# Altium PCB LPCB234R0.PcbDoc (part 2 of 2)
Units mm, origin at the board's own origin, x right, y up, seen from the top; angles counter-clockwise.
Board outline 194 x 165.7 mm, 2 copper layers (Top Layer, Bottom Layer); 143 components, 115 nets, 627 pads, 212 vias.
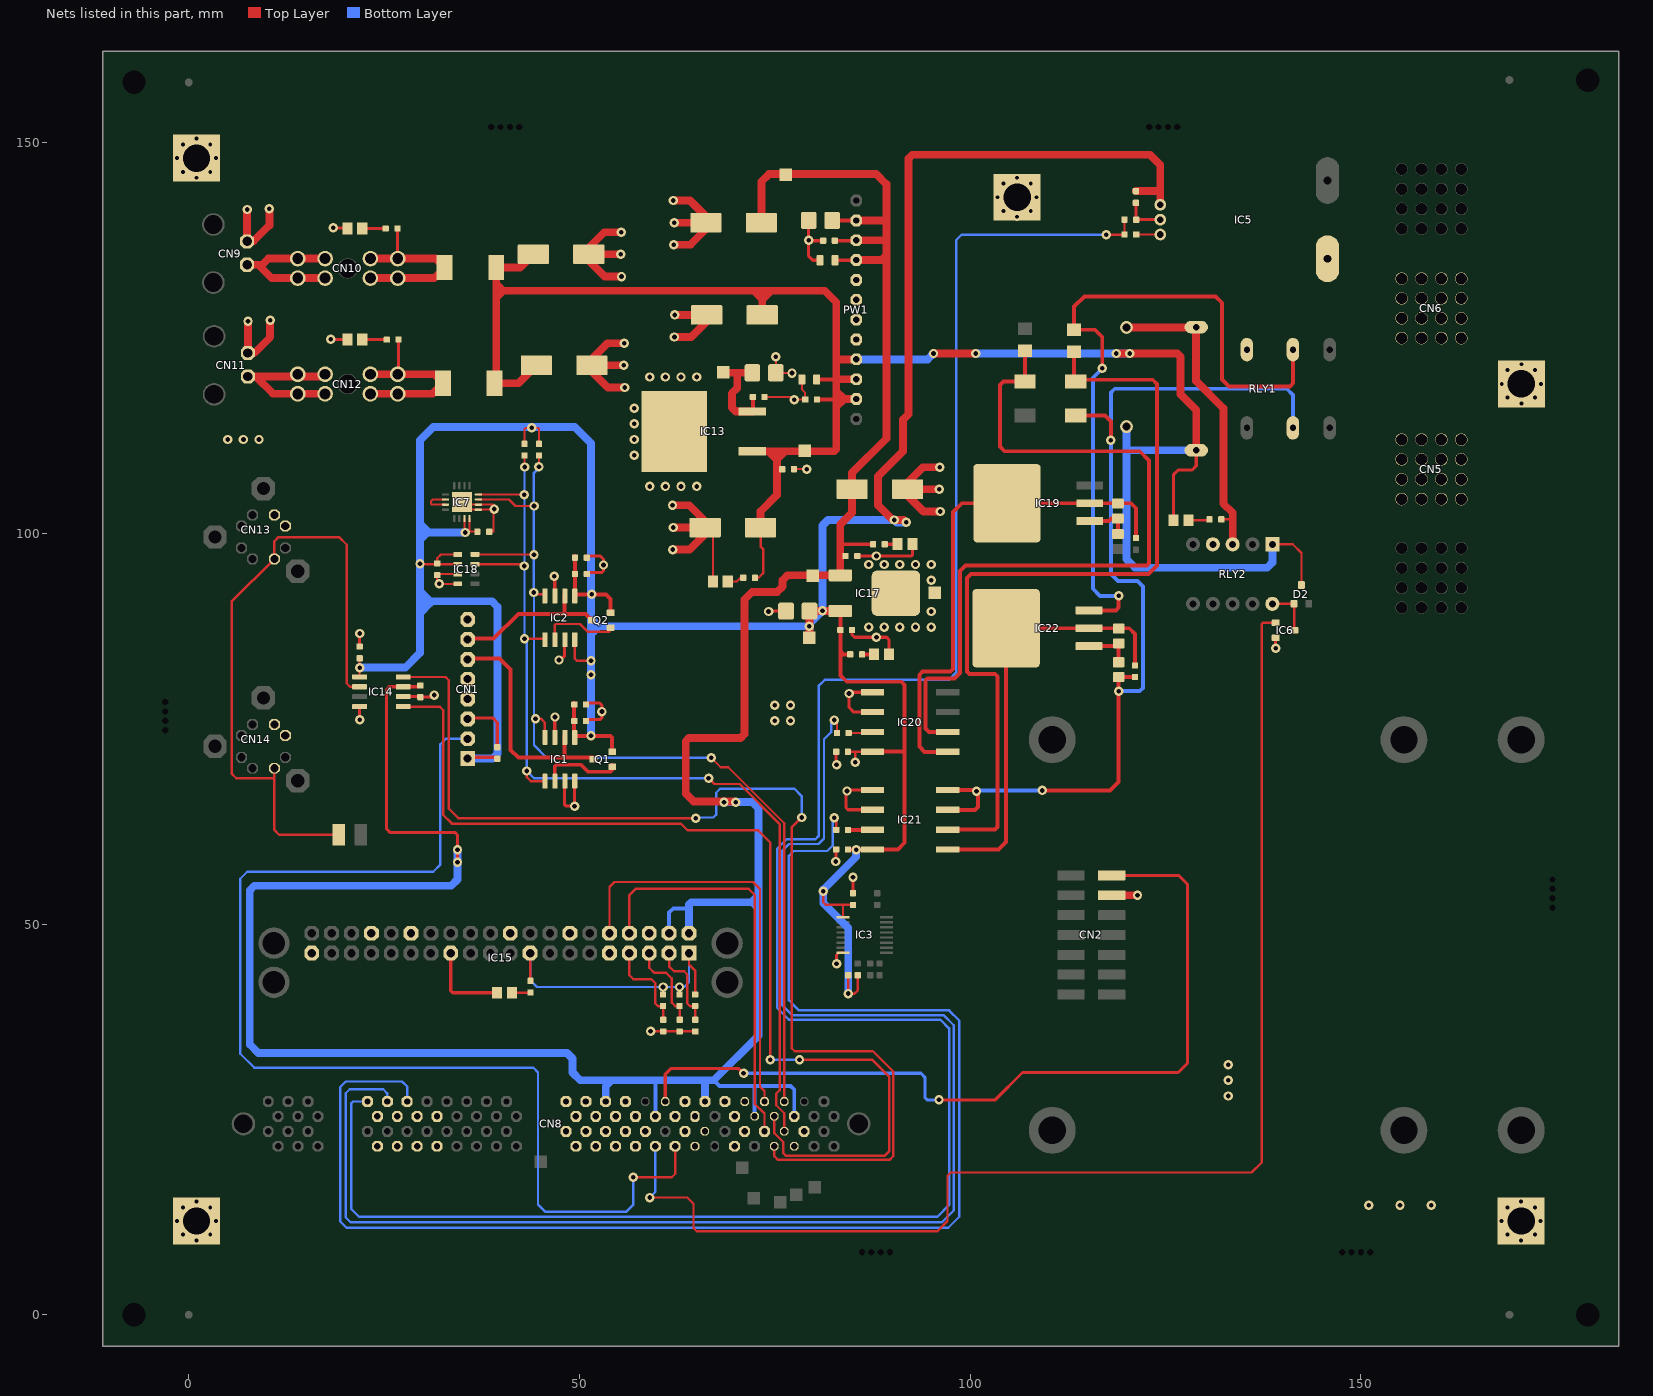
[diagram p2: the nets of this part, all layers, seen from the top]

## Via types
v1: diameter 1.2, hole 0.6, Top Layer to Bottom Layer, 168 vias
v2: diameter 1.016, hole 0.5, Top Layer to Bottom Layer, tented both sides, 40 vias
v3: diameter 0.5, hole 0.2, Top Layer to Bottom Layer, 4 vias

## Nets (pads, with @x,y where several pads share a name; then routed paths per layer and width w, separated by ;. In a path a pad name is that pad's centre, name@x,y a point inside that pad or via, vN(x,y) a via of type N, cw(c..) or ccw(c..) an arc to the next point about the centre after c; other vN are vias at no path point) (continued)
CAN_L: CN13.2 CN14.2 IC14.6 R13.2 | length 83.5
  Top Layer w0.3: CN14.2@10.96,69.933 10.96,68.66 ; R13.2@19.2,61.42 11.57,61.42 10.96,62.03 10.96,68.66 ; IC14.6@21.86,80.363 20.647,80.363 20.21,80.8 20.21,98.54 19.24,99.51 11.49,99.51 10.96,98.98 CN13.2@10.96,96.728 5.49,91.258 5.49,69.25 6.08,68.66 10.96,68.66
CHARGE_N_HOT: C25.2 CN5.1 IC21.3 IC21.4 R32.1 R33.1 RLY1.3 | length 123.6
  Top Layer w0.5: IC21.3@97.1,64.618 100.618,64.618 101,65 101,66.9 100.742,67.158 IC21.4@97.1,67.158 ; v1(109.2,67.1) 117.9,67.1 119,68.2 R32.1@119,81.598 C25.2@121.1,81.598 ; R33.1@113.5,115.048 117.252,115.048 118,114.3 v1(118,111.9)
  Bottom Layer w0.5: v1(100.8,67) 100.9,67.1 v1(109.2,67.1) ; v1(119,79.8) 121.7,79.8 122.1,80.2 122.1,93.2 121.4,93.9 118.9,93.9 118,94.8 v1(118,111.9) 118,118 118.5,118.5 140.5,118.5 141.295,117.705 RLY1.3@141.295,113.493
CHARGE_P_HOT: CN6.1 IC22.3 R29.2 RLY1.4 | length 92.3
  Top Layer w0.5: IC22.3@115.2,90.133 118.633,90.133 119,90.5 v1(119,92) ; v1(116.9,121.1) 116.9,125.1 115.952,126.048 R29.2@113.3,126.048 113.3,129 114.6,130.3 131.4,130.3 132.2,129.5 132.2,119.7 133.1,118.8 140.9,118.8 141.295,119.195 RLY1.4@141.295,123.503
  Bottom Layer w0.5: v1(116.9,121.1) 115.7,119.9 115.7,92.9 116.6,92 v1(119,92)
CHG_BUS_TIE: CN8.32 IC6.1 | length 169.7
  Top Layer w0.3: v1(59,15) 63.8,15 64.6,14.2 64.6,11.1 65,10.7 ; 68.2,10.7 65,10.7 ; IC6.1@139.085,88.535 137.435,88.535 137.3,88.4 137.3,19.5 136,18.2 97.5,18.2 97.1,17.8 97.1,12 95.8,10.7 65,10.7
  Bottom Layer w0.3: v1(59,15) 59.705,15.705 CN8.32@59.705,21.568
CHG_CURRENT: C8.1 CN8.57 R6.1 | length 281.8
  Top Layer w0.3: v1(117.4,138.2) 119.715,138.2 R6.1@119.747,138.233 C8.1@119.747,140.133
  Bottom Layer w0.3: CN8.57@22.875,27.288 21.04,27.288 20.8,27.048 20.8,13.548 21.8,12.548 95.8,12.548 97.3,14.048 97.3,36.648 96.2,37.748 76.8,37.748 75.3,39.248 75.3,59.648 76.5,60.848 80.2,60.848 80.6,61.248 80.6,80.448 81.4,81.248 97.248,81.248 98.2,82.2 98.2,137.5 98.9,138.2 v1(117.4,138.2)
D3V3A: C1.1 C2.1 C3.1 C4.1 C5.1 C6.1 C9.1 C11.1 C18.1 C20.1 C21.1 C22.1 C24.1 CN1.1 CT1.1 IC1.1 IC2.1 IC2.8 IC3.1 IC5.1 IC7.15 IC7.16 IC14.5 IC17.3 IC18.1 IC18.2 IC20.8 IC21.8 Q1.2 Q2.2 R1.2 R2.2 R18.2 R19.2 R22.2 TP8.1 | length 439.2
  Top Layer w0.254: IC7.15@35.285,101.898 35.285,100.215 v1(35.4,100.1) ; IC7.16@35.935,101.898 35.935,100.235 v1@35.9,100.2 ; C9.1@36.95,100.2 v1@35.9,100.2 ; R18.2@42.96,111.448 42.96,113.36 43.1,113.5 v1(43.9,113.5) 44.7,113.5 44.82,113.38 R19.2@44.82,111.448 ; v1(35.4,100.1) 35.5,100.2 v1@35.9,100.2 ; v1(35.4,100.1) 35.8,100.1 v1@35.9,100.2
  Top Layer w0.3: IC14.5@21.86,81.633 21.86,84 C18.1@21.87,84.01 ; v1(29.6,96.1) 29.657,96.043 IC18.2@34.43,96.043 ; C21.1@31.8,96.15 31.8,96.8 32.293,97.293 IC18.1@34.43,97.293 ; IC2.8@49.378,86.586 49.378,83.981 49.673,83.686 v1(51.473,83.686) ; v1(81.2,54.2) 81.2,52.8 81.55,52.45 83.7,52.45 ; IC3.1@83.725,50.875 83.725,52.425 83.7,52.45 ; C22.1@84.35,72.048 85.3,72.048 ; R2.2@84.4,43.45 v1(84.4,41.1) 85.2,41.1 85.6,41.5 R1.2@85.6,43.45 ; C6.1@85,52.45 83.7,52.45 ; v1(85.3,70.7) 85.3,72.048 ; IC20.8@87.5,72.038 87.49,72.048 85.3,72.048
  Top Layer w0.4: CN1.1@35.213,71.336 C5.1@39.473,71.336
  Top Layer w0.5: C3.1@49.323,78.286 49.323,74.141 49.378,74.086 53.973,74.086 54.173,73.886 Q1.2@54.173,72.236 ; C4.1@49.423,97.086 49.423,92.231 49.378,92.186 53.373,92.186 53.973,91.586 Q2.2@53.973,90.036 ; IC17.3@83.371,90.052 83.38,90.043 C11.1@83.38,87.638 83.38,84.92 ; C24.1@84.35,59.548 87.49,59.548 IC21.8@87.5,59.538 90.738,59.538 91.6,60.4 91.6,72.1 ; R22.2@84.64,84.51 83.79,84.51 83.38,84.92 ; IC20.8@87.49,72.048 87.542,72.1 91.6,72.1 ; 83.38,84.92 83.38,81.82 84.2,81 91.2,81 91.6,80.6 91.6,72.1
  Top Layer w1: TP8.1@79.43,86.638 CT1.1@79.43,90.038 79.444,90.052 IC17.3@83.371,90.052 ; v1(91.8,101.4) 91.5,101.7 v1(90.3,101.7) 90.1,101.7 88.2,103.6 88.2,107.3 91.4,110.5 91.4,114.548 92.1,115.248 92.1,147.948 92.6,148.448 123,148.448 124.32,147.128 124.32,143.8 ; C20.1@121.197,143.783 124.303,143.783 124.32,143.8 ; IC5.1@124.32,142.048 124.32,143.8
  Bottom Layer w1: v1(21.9,82.81) 27.71,82.81 29.6,84.7 29.6,89.8 ; 29.6,92.7 29.6,92.6 ; v1(35.4,100.1) 30.5,100.1 ; CN1.1@35.7,71.168 38.868,71.168 39.5,71.8 39.5,90.6 38.8,91.3 30.9,91.3 ; v1(51.473,74.086) v1(51.473,81.886) v1(51.473,83.686) 51.473,87.1 ; v1(51.573,92.186) v1@51.473,92.086 ; v1(79.4,88.1) 52.473,88.1 ; v1@79.5,87.9 79.5,88.5 v1(81.1,90.1) 81.1,101 81.8,101.7 v1(90.3,101.7) 90.6,101.4 v1(91.8,101.4) ; v1(84.4,41.1) 84.4,49.5 81.2,52.7 v1(81.2,54.2) 81.2,54.4 85.4,58.6 v1(85.4,59.5) ; 29.6,89.8 29.6,91.3 ; 29.6,89.8 30.9,91.1 30.9,91.3 ; 29.6,91.3 30.9,91.3 ; 29.6,91.3 29.6,92.6 ; 29.6,92.6 v1(29.6,96.1) 29.6,99.2 ; 29.6,92.6 30.9,91.3 ; 29.6,99.2 29.6,100.2 ; 29.6,99.2 30.5,100.1 ; 29.6,100.2 29.6,101.2 ; 29.6,100.2 29.7,100.1 30.5,100.1 ; 29.6,101.2 29.6,111.9 31.3,113.6 49.4,113.6 51.473,111.527 v1@51.473,92.086 ; 29.6,101.2 30.5,100.3 30.5,100.1 ; 51.473,87.1 51.473,88.1 ; 51.473,87.1 52.473,88.1 ; 51.473,88.1 51.473,89.1 ; 51.473,88.1 52.473,88.1 ; 51.473,89.1 v1@51.473,92.086 ; 51.473,89.1 52.473,88.1
D12VA: C13.1 CT3.1 IC13.3 TP12.1 | length 13.2
  Top Layer w0.5: IC13.3@72.13,115.578 72.18,115.628 C13.1@72.18,117.438
  Top Layer w1: TP12.1@68.43,120.638 68.53,120.538 CT3.1@72.13,120.538 ; 70.2,120.5 70.2,118.6 69.5,117.9 69.5,116.1 70.022,115.578 IC13.3@72.13,115.578
DC_A: CN9.1 CN10.1 | length 19.5
  Top Layer w1: CN9.1@7.47,134.365 8.917,134.365 ; CN10.1@17.45,132.65 CN10.1@13.95,132.65 10.632,132.65 8.917,134.365 ; CN10.1@17.45,135.15 CN10.1@13.95,135.15 10.178,135.15 9.393,134.365 8.917,134.365
DC_B: CN11.1 CN12.1 | length 19.8
  Top Layer w1: CN11.1@7.57,120.065 8.587,120.065 ; CN12.1@17.45,117.85 CN12.1@13.95,117.85 10.802,117.85 8.587,120.065 ; CN12.1@17.45,120.35 17.165,120.065 8.587,120.065
DGND: C1.2 C2.2 C3.2 C4.2 C5.2 C6.2 C8.2 C9.2 C10.2 C11.2 C12.2 C13.2 C14.2 C15.2 C16.2 C17.2 C18.2 C19.2 C20.2 C21.2 C22.2 C24.2 CE1.2 CE2.2 CE3.2 CE4.2 CE5.2 CE6.2 CN1.3 CN1.4 CN1.5 CN1.8 CN2.11 CN8.8 CN8.10 CN8.12 CN8.14 CN8.27 CN8.37 CN8.47 CN8.58 CN8.60 CN8.62 CN8.64 CN9.2 CN11.2 CN13.7 CN13.8 CN14.7 CN14.8 CT1.2 CT2.2 CT3.2 IC1.3 IC1.7 IC1.8 IC2.3 IC2.7 IC3.8 IC5.2 IC6.2 IC7.1 IC7.2 IC7.PAD IC8.K IC9.K IC10.K IC11.K IC12.K IC13.2 IC14.2 IC14.8 IC15.6 IC15.9 IC15.14 IC15.20 IC15.25 IC15.30 IC15.34 IC15.39 IC16.K IC17.4 IC18.3 IC18.4 IC20.5 IC20.6 IC21.5 IC21.6 PW1.5 PW1.6 PW1.7 PW1.8 R8.2 R9.2 R10.2 RLY2.4 TP9.1 | length 271.9
  Top Layer w0.254: IC18.4@34.43,93.543 v1(32.057,93.543) 31.8,93.8 C21.2@31.8,94.65 31.943,94.793 IC18.3@34.43,94.793 ; IC7.PAD@34.96,103.998 IC7.PAD@35.285,103.673 ; C9.2@38.45,100.2 39,100.2 39.023,100.223 v1@39.023,103.023 ; CE6.2@66.08,100.738 67.08,99.738 IC9.K@67.08,93.838 ; C13.2@73.68,117.438 77.162,117.438 v1(77.5,117.1) 78.87,117.1 C15.2@78.89,117.12 78.89,118.01 78.45,118.45 C14.2@78.45,119.68 ; v1(75.1,122.6) 75.13,122.57 CT3.2@75.13,120.538 77.162,120.538 v1(77.2,120.5) ; C12.2@77.45,108.2 v1(79.1,108.2) ; IC7.PAD@35.285,103.673 IC7.2@37.06,103.673 39.027,103.673 39.1,103.6 v1(39.1,103.1) v1@39.023,103.023 ; IC7.PAD@35.285,103.673 v3(35.51,103.448) 35.935,103.023 IC7.1@37.06,103.023 v1@39.023,103.023
  Top Layer w0.3: v1(59.1,36.3) 59.14,36.26 R8.2@60.72,36.26 R9.2@62.82,36.26 R10.2@64.82,36.26 ; 82.9,46 83.225,46.325 IC3.8@83.725,46.325
  Top Layer w0.4: v1(18.17,124.822) 20.278,124.822 IC11.K@20.3,124.8 ; v1(18.48,139.082) 20.218,139.082 IC10.K@20.3,139 ; IC14.8@21.86,77.823 21.86,76.17 21.88,76.15 v1(21.88,76.14) ; C18.2@21.87,85.51 v1(21.87,87.18) ; IC14.2@27.46,79.093 29.577,79.093 C19.2@29.64,79.03 31.13,79.03 v1(31.4,79.3) ; IC15.25@33.53,46.278 33.53,41.47 33.8,41.2 IC16.K@39.45,41.2 ; CN1.3@35.173,76.376 38.883,76.376 39.473,75.786 C5.2@39.473,72.836 ; v1(46.773,94.486) 46.838,94.421 IC2.3@46.838,92.186 ; IC1.3@46.838,74.086 46.838,76.451 v1(46.873,76.486) ; v1(47.373,83.786) 47.573,83.786 48.108,84.321 IC2.7@48.108,86.586 ; IC1.7@48.108,68.486 48.108,65.251 48.273,65.086 v1(49.373,65.086) 49.378,65.091 IC1.8@49.378,68.486 ; C1.2@50.823,76.186 52.673,76.186 52.873,76.386 52.873,77.986 52.573,78.286 C3.2@50.823,78.286 ; C2.2@50.923,94.986 52.873,94.986 53.073,95.186 53.073,96.686 52.673,97.086 C4.2@50.923,97.086 ; v1(74.2,90) 74.238,90.038 CT1.2@76.43,90.038 ; CT2.2@79.33,140.038 v1(79.33,137.51) ; C17.2@80.78,134.938 79.862,134.938 79.33,135.47 v1(79.33,137.51) ; C16.2@81.18,137.438 79.402,137.438 v1(79.33,137.51) ; v1(82.8,58) 82.85,58.05 C24.2@82.85,59.548 ; C22.2@82.85,72.048 82.85,70.45 v1(82.9,70.4) ; v1(82.9,44.9) 82.9,46 ; C11.2@84.88,87.638 84.88,87.02 85.2,86.7 89.3,86.7 89.61,86.39 IC12.K@89.61,84.51 ; C6.2@85,53.95 v1(85,56) ; C10.2@85.55,97.1 92.5,97.1 92.6,97.2 IC8.K@92.6,98.64 ; IC21.6@87.5,64.618 84.382,64.618 84.1,64.9 84.1,66.9 84.358,67.158 IC21.5@87.5,67.158 ; IC20.6@87.5,77.118 85.082,77.118 84.5,77.7 v1(84.5,79.5) 84.658,79.658 IC20.5@87.5,79.658 ; C8.2@121.024,140.356 C8.2@121.197,140.183 ; C20.2@121.197,142.283 C8.2@121.197,140.183 ; IC5.2@124.32,140.138 124.315,140.133 C8.2@121.247,140.133 C8.2@121.197,140.183 ; IC6.2@139.085,86.635 139.085,85.315 v1(139.1,85.3)
  Top Layer w1: CN9.2@7.47,137.365 v1@7.47,141.427 ; CN9.2@7.498,137.415 8.33,137.415 10.32,139.405 v1(10.32,141.545) ; CN11.2@7.57,123.065 v1@7.57,127.127 ; CN11.2@7.598,123.115 8.43,123.115 10.42,125.105 v1(10.42,127.245) ; CE4.2@51.25,135.672 51.25,134.84 53.24,132.85 v1(55.38,132.85) ; CE3.2@51.65,121.472 51.65,120.64 53.64,118.65 v1(55.78,118.65) ; v1(55.27,135.692) 55.262,135.7 CE4.2@51.2,135.7 51.2,136.532 53.19,138.522 v1(55.33,138.522) ; v1@55.662,121.5 CE3.2@51.6,121.5 51.6,122.332 53.59,124.322 v1(55.73,124.322) ; v1(61.9,103.588) 64.04,103.588 66.03,101.598 CE6.2@66.03,100.765 ; v1(61.95,97.915) 64.09,97.915 66.08,99.905 CE6.2@66.08,100.738 v1@62.018,100.738 ; v1(62,142.588) 64.14,142.588 66.13,140.598 CE2.2@66.13,139.765 ; v1(62.05,136.915) 64.19,136.915 66.18,138.905 CE2.2@66.18,139.738 v1@62.118,139.738 ; v1(62.15,125.115) 64.29,125.115 66.28,127.105 CE5.2@66.28,127.938 v1@62.218,127.938 ; CE1.2@92.03,105.61 92.03,104.778 94.02,102.788 v1(96.16,102.788) ; v1@96.042,105.638 CE1.2@91.98,105.638 91.98,106.47 93.97,108.46 v1(96.11,108.46) ; CN2.11@118.105,53.68 121.38,53.68 v1(121.4,53.7)
  other v1: 151,14 155,14 159,14 133,28 133,30 133,32 84.229,67.029 75,76 77,76 52.873,77.186 75,78 77,78 88,86.7 87,88 89,88 91,88 93,88 95,88 95,90 95,94 53.073,95.936 87,96 89,96 91,96 93,96 95,96 88,97.1 62.01,100.745 96.05,105.63 59,106 61,106 63,106 65,106 57,110 5,112 7,112 9,112 57,112 57,114 57,116 59,120 61,120 63,120 65,120 55.67,121.492 7.578,127.135 62.21,127.945 62.11,139.745 7.478,141.435
  other v3: 34.41,103.448 34.41,104.548 35.51,104.548
ECLK: CN8.46
GPIO_B3_X_USB2RCV: CN8.84
GPIO_B5: CN8.31
ISO1: MH5.MOUNT
  other v2: 106,140.5 104.25,141.25 107.75,141.25 103.5,143 108.5,143 104.25,144.75 107.75,144.75 106,145.5
ISO2: MH1.MOUNT
  other v2: 170.52,116.628 168.77,117.378 172.27,117.378 168.02,119.128 173.02,119.128 168.77,120.878 172.27,120.878 170.52,121.628
ISO3: MH2.MOUNT
  other v2: 1,145.5 -0.75,146.25 2.75,146.25 -1.5,148 3.5,148 -0.75,149.75 2.75,149.75 1,150.5
ISO4: MH3.MOUNT
  other v2: 1,9.5 -0.75,10.25 2.75,10.25 -1.5,12 3.5,12 -0.75,13.75 2.75,13.75 1,14.5
ISO5: MH4.MOUNT
  other v2: 170.5,9.5 168.75,10.25 172.25,10.25 168,12 173,12 168.75,13.75 172.25,13.75 170.5,14.5
MIBSPI1CS3: CN8.89
N2HET1_00_X_SPI4CLK: CN8.23
N2HET1_02_X_SPI4SIMO: CN8.73
N2HET1_03: CN8.41
N2HET1_04: CN8.24
N2HET1_06_X_SCIRX: CN8.74
N2HET1_08_X_MIBSPI1SIMO1: CN8.25
N2HET1_10_X_MII_TX_CLK: CN8.75
N2HET1_13: CN8.30
N2HET1_14_X_USB1TXSE0: CN8.78
N2HET1_15: CN8.35
N2HET1_16: CN8.26
N2HET1_17: CN8.80
N2HET1_18: CN8.76
N2HET1_20: CN8.36
N2HET1_21_X_USB2TXSE0_X_USB_FUNCSE0O: CN8.91
N2HET1_22: CN8.28
N2HET1_23: CN8.29
N2HET1_25: CN8.40
N2HET1_27: CN8.90
N2HET1_29: CN8.79
N2HET1_30_X_MII_RX_DV_X_USB1SPEED: CN8.86
N2HET1_31: CN8.85
NetC23_1: C23.1 IC19.2 IC19.4 IC20.1 R24.2 | length 65.8
  Top Layer w0.5: IC20.1@97.1,72.038 94.162,72.038 93.5,72.7 93.5,81.9 93.9,82.3 97.482,82.3 97.8,82.618 97.8,102.7 98.948,103.848 IC19.4@104.7,103.848 IC19.2@115.3,103.848 R24.2@118.85,103.848 ; R24.2@118.9,103.798 R24.2@118.85,103.848 ; C23.1@121.2,99.398 121.2,103.2 120.552,103.848 R24.2@118.85,103.848
NetC25_1: C25.1 IC21.1 IC22.2 IC22.4 R30.2 | length 56.1
  Top Layer w0.5: IC21.1@97.1,59.538 103.638,59.538 104.6,60.5 IC22.4@104.6,87.848 IC22.2@115.2,87.848 R30.2@118.95,87.848 ; R30.2@119,87.798 R30.2@118.95,87.848 ; C25.1@121.1,83.098 121.1,87.1 120.352,87.848 R30.2@118.95,87.848
NetCN1_2: CN1.2 CN8.34 | length 149.6
  Top Layer w0.3: v1(56.9,17.6) 56.9,17.5 57,17.6 61.8,17.6 62.245,18.045 CN8.34@62.245,21.568
  Bottom Layer w0.3: CN1.2@35.7,73.708 32.908,73.708 32.2,73 32.2,57.6 31.3,56.7 7.5,56.7 6.6,55.8 6.6,33.4 8.4,31.6 44.1,31.6 44.7,31 44.7,14.1 45.6,13.2 56,13.2 56.9,14.1 v1(56.9,17.6)
NetCN2_13: CN2.13 CN8.83 | length 108.8
  Top Layer w0.4: CN8.83@60.975,27.288 60.975,30.775 61.7,31.5 70.4,31.5 v1(71,30.9) ; v1(96,27.5) 103.2,27.5 106.7,31 126.6,31 126.8,31.2 127.8,32.2 127.8,55.1 126.68,56.22 CN2.13@118.105,56.22
  Bottom Layer w0.4: v1(71,30.9) 93.7,30.9 94.2,30.4 94.2,27.8 94.5,27.5 v1(96,27.5)
NetCN8_59: CN8.59 R26.2 | length 191.4
  Top Layer w0.3: v1(82.6,76.1) 82.95,75.75 R26.2@82.95,74.448
  Bottom Layer w0.3: CN8.59@25.415,27.288 25.415,28.333 24.9,28.848 20.6,28.848 20.1,28.348 20.1,12.448 20.7,11.848 96.4,11.848 97.9,13.348 97.9,37.048 96.6,38.348 77.2,38.348 75.9,39.648 75.9,59.348 76.8,60.248 80.6,60.248 81.3,60.948 81.3,73.648 82.2,74.548 82.2,75.7 v1(82.6,76.1)
NetCN8_61: CN8.61 R31.2 | length 186.2
  Top Layer w0.3: v1@82.4,63.6 82.85,63.15 R31.2@82.85,62.048
  Bottom Layer w0.3: CN8.61@27.955,27.288 27.955,29.193 27.3,29.848 20.1,29.848 19.4,29.148 19.4,11.948 20.2,11.148 97.2,11.148 98.6,12.548 98.6,37.648 97.3,38.948 78.1,38.948 76.8,40.248 76.8,58.748 77.4,59.348 81.7,59.348 82.4,60.048 v1@82.4,63.6
  other v1: 82.6,63.6
NetCN10_2: CN10.2 D3.2 R20.2 | length 23.9
  Top Layer w0.4: R20.2@26.7,139 26.7,135.2 CN10.2@26.75,135.15
  Top Layer w1: CN10.2@23.25,132.65 CN10.2@26.75,132.65 31.4,132.65 D3.2@32.75,134 31.6,135.15 CN10.2@26.75,135.15 CN10.2@23.25,135.15
NetCN12_2: CN12.2 D4.2 R21.2 | length 24.1
  Top Layer w0.4: CN12.2@26.75,120.35 26.84,120.44 R21.2@26.84,124.792
  Top Layer w1: CN12.2@23.25,117.85 CN12.2@26.75,117.85 31.2,117.85 D4.2@32.55,119.2 31.4,120.35 CN12.2@26.75,120.35 CN12.2@23.25,120.35
NetD1_A: D1.A R5.1 RLY1.B RLY2.3 | length 40.2
  Top Layer w0.3: R5.1@132.135,101.785 133.285,101.785 133.585,101.485
  Top Layer w1: D1.A@120,126.348 RLY1.B@128.9,126.348 ; RLY1.B@128.925,126.373 RLY1.B@128.9,126.348 ; RLY2.3@133.585,98.595 133.585,101.485 133.585,102.615 132.4,103.8 132.4,116 128.9,119.5 RLY1.B@128.9,126.348
NetD2_1: D2.1 IC6.3 RLY2.10 | length 6.2
  Top Layer w0.3: RLY2.10@138.665,90.975 141.425,90.975 D2.1@141.435,90.985 141.485,90.935 IC6.3@141.485,87.585
NetIC1_6: IC1.6 Q1.1 | length 10.2
  Top Layer w0.5: IC1.6@46.838,68.486 46.838,70.151 47.073,70.386 50.173,70.386 51.073,69.486 53.973,69.486 54.173,69.686 Q1.1@54.173,70.336
NetIC2_6: IC2.6 Q2.1 | length 9.9
  Top Layer w0.3: IC2.6@46.838,86.586 46.838,88.251 46.973,88.386 50.073,88.386 51.073,87.386 53.773,87.386 53.973,87.586 Q2.1@53.973,88.136
NetIC4_K: IC4.K R5.2 | length 2.7
  Top Layer w0.3: IC4.K@127.935,101.685 130.535,101.685 R5.2@130.635,101.785
NetIC5_3: IC5.3 R6.2 | length 3.1
  Top Layer w0.3: R6.2@121.247,138.233 124.315,138.233 IC5.3@124.32,138.228
NetIC5_B: IC5.B RLY1.6
NetIC7_10: IC7.10 IC7.11 | length 4.2
  Top Layer w0.254: IC7.11@32.86,103.673 31.127,103.673 31,103.8 31,104.1 31.223,104.323 IC7.10@32.86,104.323
NetIC8_A: IC8.A R11.1 | length 1.6
  Top Layer w0.5: R11.1@89.07,98.6 90.66,98.6 IC8.A@90.7,98.64
NetIC9_A: IC9.A R12.1 | length 2.2
  Top Layer w0.3: IC9.A@68.98,93.838 70.138,93.838 70.6,94.3 R12.1@70.95,94.3
NetIC10_A: IC10.A R20.1 | length 3
  Top Layer w0.4: IC10.A@22.2,139 R20.1@25.2,139
NetIC11_A: IC11.A R21.1 | length 3.1
  Top Layer w0.4: IC11.A@22.2,124.8 25.332,124.8 R21.1@25.34,124.792
NetIC12_A: IC12.A R22.1 | length 1.6
  Top Layer w0.5: R22.1@86.14,84.51 IC12.A@87.71,84.51
NetIC16_A: IC16.A R25.1 | length 2.4
  Top Layer w0.3: IC16.A@41.35,41.2 41.378,41.228 R25.1@43.72,41.228
NetIC19_1: IC19.1 R24.1 R27.2 | length 5.7
  Top Layer w0.5: IC19.1@115.3,101.563 117.763,101.563 118.098,101.898 R24.1@118.9,101.898 R27.2@118.9,99.898
NetIC20_2: IC20.2 R23.1 R28.2 | length 99.8
  Top Layer w0.5: IC20.2@97.1,74.578 94.722,74.578 94.3,75 94.3,81.2 94.5,81.4 98,81.4 98.7,82.1 98.7,95.2 99.4,95.9 122.6,95.9 122.9,96.2 122.9,109.3 121.7,110.5 104.4,110.5 103.8,111.1 103.8,119 104.248,119.448 R28.2@107,119.448 R23.1@107,123.348
NetIC20_7: IC20.7 R26.1 | length 3.1
  Top Layer w0.3: R26.1@84.45,74.448 87.37,74.448 IC20.7@87.5,74.578
NetIC21_2: IC21.2 R29.1 R33.2 | length 104.9
  Top Layer w0.5: IC21.2@97.1,62.078 103.178,62.078 103.5,62.4 103.5,81.7 103.2,82 99.9,82 99.6,82.3 99.6,94.3 100.1,94.8 122.8,94.8 123.9,95.9 123.9,119.1 123.352,119.648 R33.2@113.3,119.648 ; R29.1@113.3,123.248 R33.2@113.3,119.648 ; R33.2@113.5,119.448 R33.2@113.3,119.648
NetIC21_7: IC21.7 R31.1 | length 3.2
  Top Layer w0.5: R31.1@84.35,62.048 87.47,62.048 IC21.7@87.5,62.078
NetIC22_1: IC22.1 R30.1 R32.2 | length 6.3
  Top Layer w0.5: IC22.1@115.2,85.563 118.665,85.563 R30.1@119,85.898 R32.2@119,83.498
ONEWIRE_A: CN1.6 IC1.2 Q1.3 | length 30.7
  Top Layer w0.5: CN1.6@35.173,83.996 39.763,83.996 41.173,82.586 41.173,72.286 42.173,71.286 48.073,71.286 ; IC1.2@48.108,74.086 48.108,71.321 48.073,71.286 ; Q1.3@51.773,71.286 48.073,71.286
ONEWIRE_B: CN1.7 IC2.2 Q2.3 | length 20.5
  Top Layer w0.5: CN1.7@35.173,86.536 39.023,86.536 42.173,89.686 48.173,89.686 ; IC2.2@48.108,92.186 48.108,89.751 48.173,89.686 ; Q2.3@51.573,89.086 51.373,89.086 50.773,89.686 48.173,89.686
P5V: C10.1 C16.1 C17.1 C19.1 CE1.1 CE2.1 CN8.77 CN8.82 CN8.87 CN8.92 CN8.96 CT2.1 IC14.3 IC15.2 IC15.4 IC17.1 PW1.9 PW1.10 PW1.11 R11.2 TP7.1 TP10.1 | length 390.4
  Top Layer w0.4: C19.1@29.64,80.53 29.473,80.363 IC14.3@27.46,80.363 25.663,80.363 25.3,80 25.3,62.2 25.8,61.7 34.1,61.7 34.4,61.4 v1(34.4,59.5) v1(34.4,57.9) ; 83.371,98.6 R11.2@87.57,98.6
  Top Layer w0.5: CT2.1@82.33,140.038 PW1.11@85.43,140.038 ; C17.1@82.68,134.938 85.41,134.938 PW1.9@85.43,134.958 ; C16.1@82.68,137.438 85.37,137.438 PW1.10@85.43,137.498
  Top Layer w1: v1@69.8,65.7 64.6,65.7 63.6,66.7 63.6,73.4 64,73.8 70.6,73.8 71.1,74.3 71.1,91.5 72.1,92.5 75.3,92.5 76,93.2 76,94 76.624,94.624 TP10.1@79.916,94.624 ; CE2.1@73.28,139.738 73.28,144.98 74.27,145.97 87.98,145.97 89.27,144.68 89.27,139.98 ; TP10.1@79.83,94.538 TP10.1@79.916,94.624 ; PW1.9@85.43,134.958 88.658,134.958 89.27,135.57 ; PW1.10@85.43,137.498 89.268,137.498 89.27,137.5 ; PW1.11@85.43,140.038 89.212,140.038 89.27,139.98 ; TP10.1@79.916,94.624 IC17.1@83.371,94.624 83.371,98.6 83.371,101.119 84.88,102.628 CE1.1@84.88,105.638 84.88,107.728 89.27,112.118 89.27,135.57 ; 89.27,135.57 89.27,137.5 ; 89.27,137.5 89.27,139.98
  Bottom Layer w0.5: 59.7,30 59.705,29.995 CN8.82@59.705,25.388 ; IC15.4@61.47,48.818 61.47,51.47 62,52 64.01,52 ; 67.2,30 67.9,29.3 72.2,29.3 ; CN8.92@72.405,25.388 72.405,29.095 72.2,29.3 ; CN8.96@77.485,25.388 77.485,28.815 77,29.3 72.2,29.3
  Bottom Layer w1: v1(34.4,59.5) v1(34.4,57.9) 34.4,55.7 33.6,54.9 8.4,54.9 7.8,54.3 7.8,34.6 8.9,33.5 48.4,33.5 49.1,32.8 49.1,31 50.1,30 54.1,30 ; CN8.77@53.355,27.288 53.355,29.255 54.1,30 ; IC15.2@64.01,48.818 64.01,52 64.01,52.51 64.3,52.8 72,52.8 ; CN8.87@66.055,27.288 66.055,29.955 66.1,30 ; v1(68.5,65.6) v1(70,65.6) 72.1,65.6 72.9,64.8 72.9,53.7 ; 54.1,30 59.7,30 66.1,30 ; 66.1,30 67.2,30 72.9,35.7 72.9,52 ; 72,52.8 72.1,52.8 72.9,52 ; 72,52.8 72.9,53.7 ; 72.9,52 72.9,53.7
P24VA: C12.1 C14.1 C15.1 CE3.1 CE4.1 CE5.1 CE6.1 D1.K D2.3 D3.1 D4.1 IC4.A IC13.1 PW1.2 PW1.3 PW1.4 R12.2 RLY1.A RLY2.1 TP11.1 | length 269
  Top Layer w0.3: R12.2@72.45,94.3 72.9,94.3 73.5,94.9 73.5,98 73.18,98.32 CE6.1@73.18,100.738 ; RLY2.1@138.665,98.595 141.275,98.595 142.385,97.485 D2.3@142.385,93.385
  Top Layer w0.4: IC4.A@126.035,101.685 126.035,107.535 126.6,108.1 128.4,108.1 128.925,108.625 RLY1.A@128.925,110.623
  Top Layer w0.5: C14.1@80.35,119.68 82.822,119.68 82.86,119.718 ; C15.1@80.39,117.12 82.73,117.12 82.86,117.25
  Top Layer w1: CE4.1@44.1,135.7 42.4,134 D3.1@39.35,134 39.35,131.9 ; CE3.1@44.5,121.5 42.2,119.2 D4.1@39.15,119.2 39.35,119.4 39.35,130.18 ; IC13.1@72.13,110.498 74.2,110.498 ; CE6.1@73.18,100.738 73.18,102.81 75.26,104.89 75.26,109.438 ; CE5.1@73.38,127.938 73.38,129.97 ; 83.062,119.718 PW1.3@85.43,119.718 ; PW1.2@85.43,117.178 83.852,117.178 ; PW1.4@85.43,122.258 82.902,122.258 82.86,122.3 ; v1(95.3,123) v1(100.7,123) ; v1(118.7,123) v1(120.4,123) 126.5,123 126.9,122.6 126.9,117.8 128.925,115.775 RLY1.A@128.925,110.623 ; 39.35,130.18 39.35,131.1 ; 39.35,130.18 40.21,131.04 ; 39.35,131.1 39.35,131.9 ; 39.35,131.1 39.41,131.04 40.21,131.04 ; 39.35,131.9 40.21,131.04 ; 40.21,131.04 72.31,131.04 ; 72.31,131.04 73.33,131.04 ; 72.31,131.04 73.38,129.97 ; 73.33,131.04 74.53,131.04 ; 73.33,131.04 73.38,130.99 73.38,129.97 ; 73.38,129.97 73.46,129.97 74.53,131.04 ; 74.2,110.498 75.26,110.498 ; 74.2,110.498 75.26,109.438 ; 74.53,131.04 81.39,131.04 82.86,129.57 82.86,122.3 ; 75.26,109.438 75.26,110.498 ; 75.26,109.438 76.32,110.498 ; 75.26,110.498 76.32,110.498 ; 76.32,110.498 82.598,110.498 82.86,110.76 82.86,116.185 ; 82.86,116.185 82.86,117.25 ; 82.86,116.185 83.852,117.178 ; 82.86,117.25 82.86,118.17 ; 82.86,117.25 82.932,117.178 83.852,117.178 ; 82.86,118.17 82.86,119.718 82.86,122.3 ; 82.86,118.17 83.852,117.178
  Bottom Layer w1: PW1.4@85.43,122.258 94.558,122.258 v1(95.3,123) ; v1(100.7,123) v1(118.7,123) v1(120.4,123) ; D1.K@120,113.648 120,110.8 ; RLY1.A@128.925,110.623 120.177,110.623 120,110.8 ; RLY2.1@138.665,98.595 138.665,96.265 138,95.6 121.1,95.6 120,96.7 120,110.8
PI_D3V3: IC15.1 IC15.17 R14.1 R15.1 R16.1 R25.2 | length 37.3
  Top Layer w0.3: IC15.17@43.69,46.278 43.69,42.758 R25.2@43.72,42.728 ; IC15.1@64.01,46.278 64.01,44.838 64.8,44.048 R14.1@64.8,40.998
  Bottom Layer w0.3: IC15.17@43.69,46.278 43.69,42.81 44.552,41.948 v1(60.7,41.948) v1(62.8,41.948) 63.4,41.948 64.01,42.558 IC15.1@64.01,46.278
PI_ID1: IC15.3 R10.1 R14.2 | length 11.3
  Top Layer w0.3: IC15.3@61.47,46.278 61.47,44.578 62.1,43.948 63.4,43.948 63.8,43.548 63.8,39.848 64.15,39.498 R14.2@64.8,39.498 ; R10.1@64.82,37.76 R14.2@64.82,39.71
PI_ID2: IC15.5 R9.1 R15.2 | length 11.3
  Top Layer w0.3: IC15.5@58.93,46.278 58.93,44.418 59.6,43.748 61.1,43.748 61.8,43.048 61.8,39.948 62.25,39.498 R15.2@62.8,39.498 ; R9.1@62.82,37.76 R15.2@62.82,39.51
PI_ID3: IC15.7 R8.1 R16.2 | length 11.7
  Top Layer w0.3: IC15.7@56.39,46.278 56.39,43.458 56.9,42.948 59.2,42.948 59.7,42.448 59.7,39.848 60.05,39.498 R16.2@60.7,39.498 ; R8.1@60.72,37.76 R16.2@60.72,39.21
PI_UART_RX_IN: CN8.93 IC15.10 | length 53.2
  Top Layer w0.3: IC15.10@53.85,48.818 53.85,54.73 54.49,55.37 72.22,55.37 73.11,54.48 73.11,29.19 73.675,28.625 CN8.93@73.675,27.288
PI_UART_TX_OUT: CN8.43 IC15.8 | length 52.4
  Top Layer w0.3: IC15.8@56.39,48.818 56.39,53.72 57.17,54.5 71.65,54.5 72.43,53.72 72.43,26.99 73.675,25.745 CN8.43@73.675,23.468
RM4_CAN_RX: CN8.44 IC14.4 | length 146.4
  Top Layer w0.3: IC14.4@27.46,81.633 27.473,81.62 32.85,81.62 33.27,81.2 33.27,64.77 34.49,63.55 v1(64.89,63.55) ; CN8.44@74.945,21.568 74.945,20.285 75.41,19.82 89.69,19.82 90.15,20.28 90.15,31.13 87.57,33.71 77.55,33.71 77.15,34.11 77.15,62.35 v1(78.43,63.63)
  Bottom Layer w0.3: v1(64.89,63.55) 64.97,63.63 67.13,63.63 67.5,64 67.5,66.8 68,67.3 77.5,67.3 78.43,66.37 v1(78.43,63.63)
RM4_CAN_TX: CN8.94 IC14.1 | length 134.6
  Top Layer w0.3: IC14.1@27.46,77.823 32.097,77.823 32.56,77.36 32.56,63.96 33.67,62.85 62.96,62.85 63.82,61.99 72.86,61.99 74.42,60.43 v1(74.42,32.65) ; CN8.94@74.945,25.388 74.945,23.225 76.09,22.08 76.09,20.68 76.44,20.33 89.05,20.33 89.62,20.9 89.62,30.48 87.45,32.65 v1(78.15,32.65)
  Bottom Layer w0.3: v1(74.42,32.65) v1(78.15,32.65)
RM4_I2C_SCL: CN8.95 IC1.4 IC2.4 IC7.3 IC18.8 R19.1 | length 128.9
  Top Layer w0.3: IC18.8@36.63,97.293 44.125,97.293 v1(44.18,97.238) ; IC7.3@37.06,104.323 40.995,104.323 41.83,103.488 v1(44.19,103.488) ; v1@44.251,92.509 44.573,92.186 IC2.4@45.568,92.186 ; v1(44.373,76.286) 45.073,76.286 45.568,75.791 IC1.4@45.568,74.086 ; v1(44.81,108.508) 44.82,108.518 R19.1@44.82,109.948 ; v1(66.86,71.28) 68.07,70.07 69.03,70.07 76.215,62.885 CN8.95@76.215,27.288
  Bottom Layer w0.3: v1(44.17,92.428) 44.17,107.728 44.81,108.368 v1(44.81,108.508) ; v1@44.173,92.586 44.173,72.898 45.791,71.28 v1(66.86,71.28)
RM4_I2C_SDA: CN8.45 IC1.5 IC2.5 IC7.4 IC18.7 R18.1 | length 133.9
  Top Layer w0.3: IC18.7@36.63,96.043 42.685,96.043 v1(42.92,95.808) ; IC7.4@37.06,104.973 42.915,104.973 v1(42.94,104.948) ; R18.1@42.96,109.948 42.96,108.528 v1(43.01,108.478) ; v1(42.973,86.486) 45.468,86.486 IC2.5@45.568,86.586 ; v1(43.273,69.588) 43.273,68.774 43.762,68.285 IC1.5@45.585,68.285 ; v1(66.52,68.66) 67.27,67.91 70.5,67.91 75.61,62.8 75.61,28.74 75.18,28.31 75.18,26.82 76.215,25.785 CN8.45@76.215,23.468
  Bottom Layer w0.3: v1(43.01,108.478) 42.963,108.431 42.963,86.496 v1(42.973,86.486) 43.273,86.186 v1(43.273,69.588) 44.201,68.66 v1(66.52,68.66)
pads on no net: CN2.4 CN2.6 CN2.8 CN2.12 CN8.1 CN8.2 CN8.3 CN8.4 CN8.5 CN8.6 CN8.18 CN8.20 CN8.22 CN8.48 CN8.49 CN8.50 CN8.51 CN8.52 CN8.53 CN8.54 CN8.55 CN8.56 CN8.68 CN8.70 CN8.72 CN8.97 CN8.98 CN8.99 CN8.100 CN8.B CN9.B CN10.B CN11.B CN12.B CN13.3 CN13.4 CN13.5 CN13.6 CN13.B CN14.3 CN14.4 CN14.5 CN14.6 CN14.B D2.2 FID8_1.1 FID8_1_1.1 FID10_1.1 FID10_1_1.1 IC7.5 IC7.6 IC7.7 IC7.8 IC7.9 IC7.12 IC7.13 IC7.14 IC15.11 IC15.12 IC15.13 IC15.15 IC15.16 IC15.18 IC15.19 IC15.21 IC15.22 IC15.23 IC15.24 IC15.26 IC15.27 IC15.28 IC15.29 IC15.31 IC15.32 IC15.33 IC15.35 IC15.36 IC15.37 IC15.38 IC15.40 IC15.B IC18.5 IC18.6 PW1.1 PW1.12 RLY1.1 RLY1.2 RLY2.2 RLY2.5 RLY2.6 RLY2.7 RLY2.8 RLY2.9 SN1.0 SN2.0 SN3.0 SN4.0 SN5.0 SN6.0 TOOLHOLE1_1.TOOL TOOLHOLE1_1_1.TOOL TOOLHOLE5_1.TOOL1 TOOLHOLE5_1_1.TOOL1

## Polygon pours and split planes (outlines as drawn)
DGND on Top Layer "Top Layer-No Net" (solid, remove dead copper, pour order 15): -3,152 127.7,152 127.8,151.9 127.9,152 129,152 129,100 143,100 143,88 174.4,88 174.4,8.1 174.5,8 -3,8
BATT_P_HOT on Top Layer "Top Layer-No Net" (solid, pour order 21): 142,148.848 163.5,148.848 163.5,137.848 154,137.848 154,141.348 142,141.348
NetIC5_B on Top Layer "Top Layer-No Net" (solid, pour order 19): 133.5,120.348 138.5,120.348 138.5,129.348 148.5,129.348 148.5,139.348 142,139.348 142,132.848 133.5,132.848
CHARGE_P_HOT on Top Layer "Top Layer-No Net" (solid, pour order 17): 139.5,120.348 164,120.348 164,133.348 152.5,133.348 152.5,127.848 139.5,127.848
BATT_N_HOT on Top Layer "Top Layer-No Net" (solid, pour order 15): 133.5,116.848 138.5,116.848 138.5,108.348 149.5,108.348 149.5,99.848 150,99.348 163,99.348 163.5,98.848 164,98.348 164,89.348 146,89.348 145.5,89.848 145.5,101.848 145.5,103.848 145,104.348 133.5,104.348 133.5,116.848
CHARGE_N_HOT on Top Layer "Top Layer-No Net" (solid, pour order 13): 139.5,116.348 140,116.848 164,116.848 164,103.348 150.5,103.348 150.5,109.348 139.5,109.348
DGND on Bottom Layer "Top Layer-No Net" (solid, remove dead copper, pour order 15): -3,152 127.7,152 127.8,151.9 127.9,152 129,152 129,100 143,100 143,88 174.4,88 174.4,8.1 174.5,8 -3,8
CHARGE_N_HOT on Bottom Layer "Top Layer-No Net" (solid, pour order 13): 139.5,116.348 140,116.848 164,116.848 164,103.348 150.5,103.348 150.5,109.348 139.5,109.348
BATT_N_HOT on Bottom Layer "Top Layer-No Net" (solid, pour order 15): 133.5,116.848 138.5,116.848 138.5,108.348 149.5,108.348 149.5,99.848 150,99.348 163,99.348 163.5,98.848 164,98.348 164,89.348 146,89.348 145.5,89.848 145.5,101.848 145.5,103.848 145,104.348 133.5,104.348 133.5,116.848
CHARGE_P_HOT on Bottom Layer "Top Layer-No Net" (solid, pour order 17): 139.5,120.348 164,120.348 164,133.348 152.5,133.348 152.5,127.848 139.5,127.848
NetIC5_B on Bottom Layer "Top Layer-No Net" (solid, pour order 19): 133.5,120.348 138.5,120.348 138.5,129.348 148.5,129.348 148.5,139.348 142,139.348 142,132.848 133.5,132.848
BATT_P_HOT on Bottom Layer "Top Layer-No Net" (solid, pour order 21): 142,148.848 163.5,148.848 163.5,137.848 154,137.848 154,141.348 142,141.348

## Keep-outs
Keep-Out Layer:
  lines w0.5: -3,8 -3,152 174.5,152 174.5,8 -3,8

## Other copper
Top Layer:
  text "rLoop - RM4 Power Node, Rev 1.0" at 8.2,-1 h3

## Silkscreen, mask and mechanical layers (free items; w line width, h text height)
Top Overlay:
  lines w0.1: 105.5,18.6 175.5,18.6 175.5,78.6 105.5,78.6 105.5,18.6
  lines w1: 105.5,56.348 105.5,78.6 174.5,78.6 174.5,152 97.5,152 97.5,82.348 92.5,82.348 92.5,81.348 92.5,56.348 105.5,56.348 ; 105.5,56.348 105.5,56.348
  text "DC A" at 19.07,140.502 h1.5
  text "BATT HOT +" at 164.02,137.64 h1.5
  text "DC B" at 19.07,126.262 h1.5
  text "CHARGE +" at 164.02,123.74 h1.5
  text "CAUTION" at 156.37,120.058 h1.5
  text "INSULATE" at 156.37,118.098 h1.5
  text "FASTENER" at 156.37,116.108 h1.5
  text "CHG" at 125.17,104.8 h1.5
  text "CHARGE -" at 164.02,103.165 h1.5
  text "ON" at 125.17,102.89 h1.5
  text "P5V" at 96.03,96.218 h1.5 r90
  text "P24V" at 61.72,92.8 h1.5
  text "BATT HOT -" at 164.02,89.165 h1.5
  text "D3V3" at 91.15,83.38 h1.5
  text "ID3" at 59.82,34.81 h1.5 r270
  text "ID2" at 61.82,34.81 h1.5 r270
  text "ID1" at 63.82,34.81 h1.5 r270
  text "rLoop RM4 Power Node" at 145.38,16.44 h2
  text "Rev 1.0" at 145.28,14.04 h2
  text "S/N:" at 145.18,9.24 h2
Mechanical 1:
  lines w0.1: -11,-4 183,-4 183,161.695 -11,161.695 -11,-4
  lines w0.127: -3,8 174.5,8 174.5,152 -3,152 -3,8
Mechanical 3:
  lines w2.4: -4.2,72.8 -4.2,6.8 84.6,6.8 ; -4.2,80 -4.2,153.2 37.3,153.2 ; 44.5,153.2 121.3,153.2 ; 91.8,6.8 145.8,6.8 ; 128.5,153.2 175.7,153.2 175.7,57.2 ; 153,6.8 175.7,6.8 175.7,50

## Text inside footprints (layer, text, board x,y; h text height)
LBL1: Top Overlay "STATIC SENSITIVE" at 93.406,8.992 h2
LBL2: Top Overlay "rloop.org" at 133.71,10.448 h1
LBL3: Top Overlay "HIGH VOLTAGE" at 144,80.698 h2.16; Top Overlay "DANGER" at 147.063,82.542 h2.16